# EAGLE board 1sluzba (EAGLE 8.5.0)
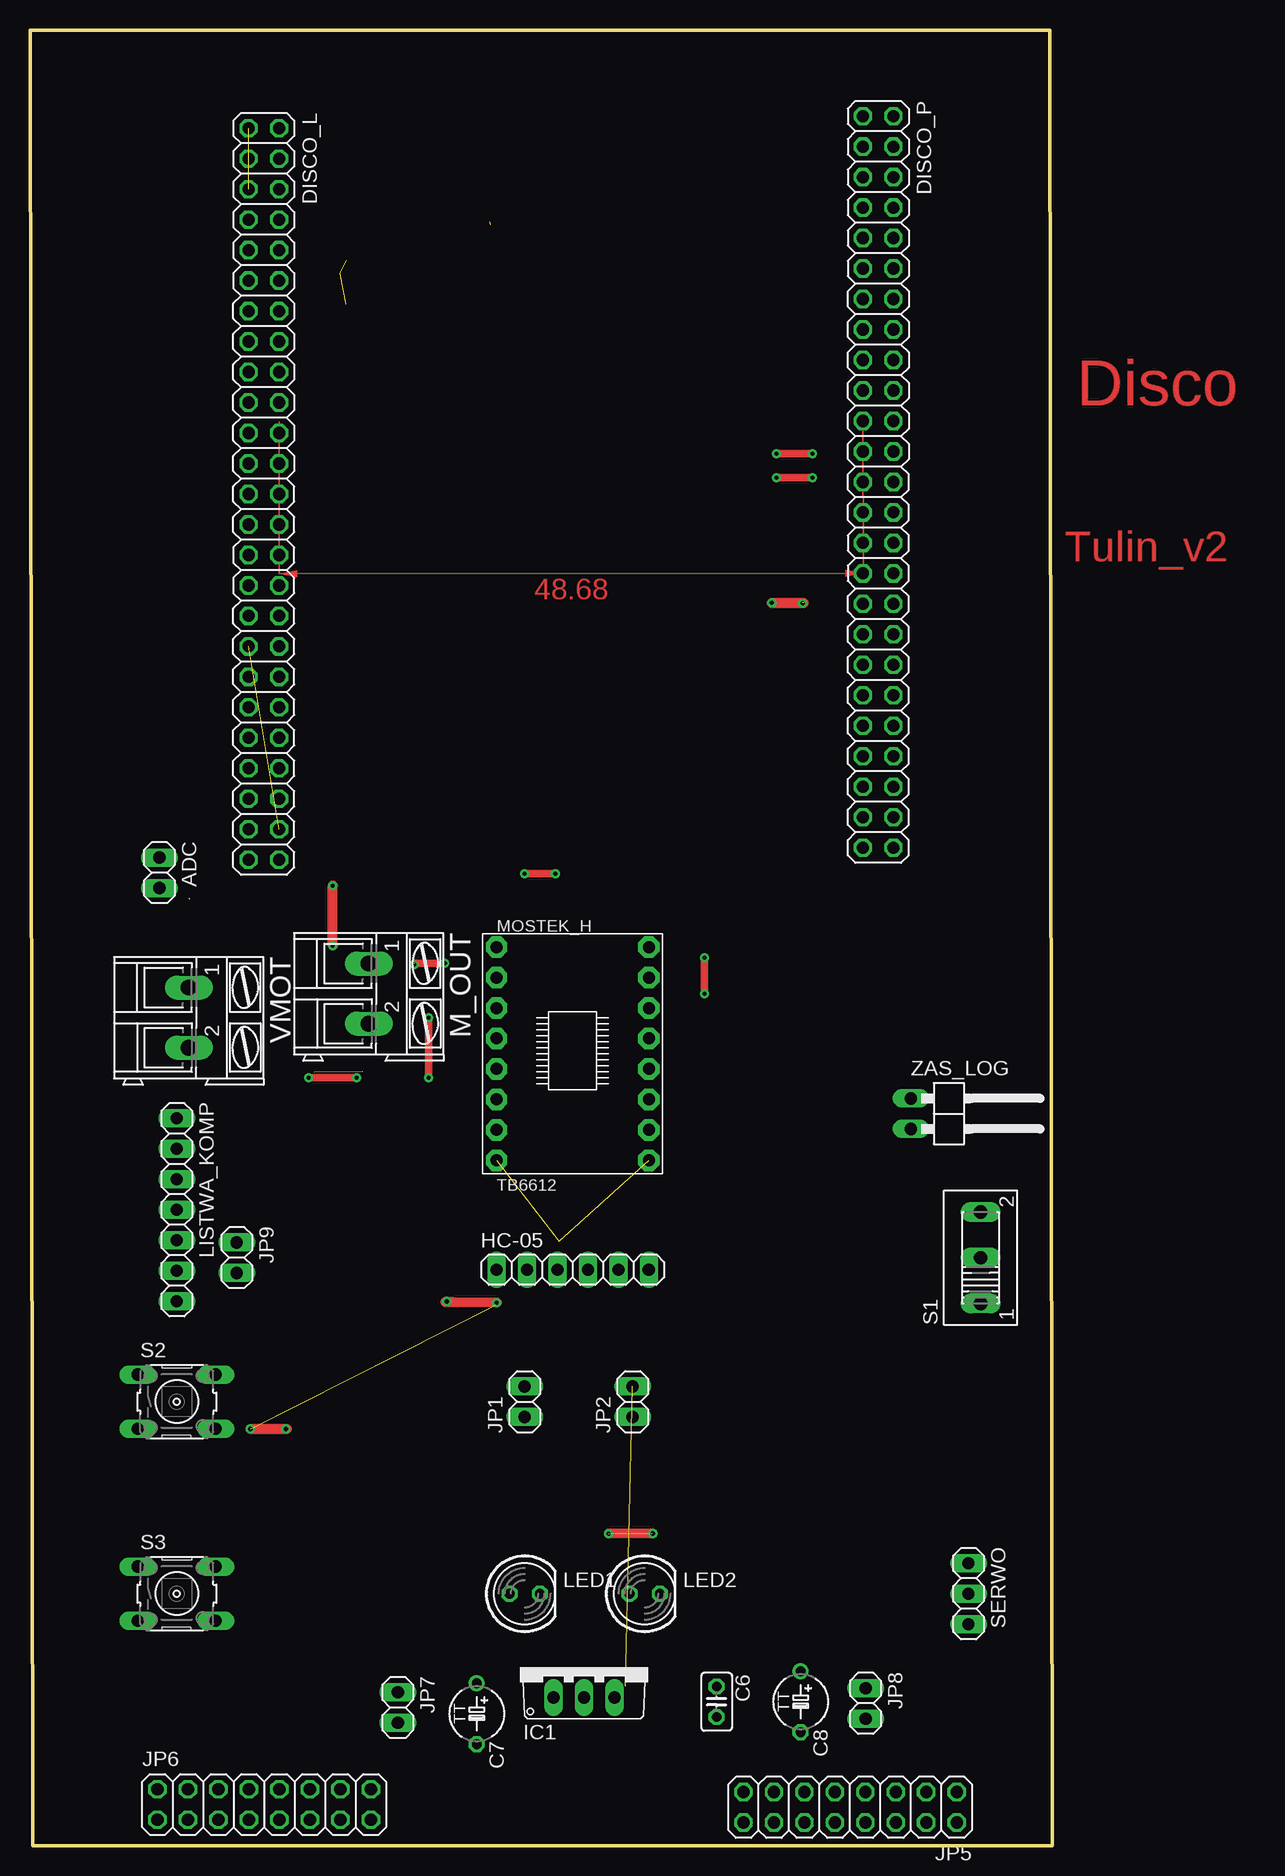
[diagram p0: board, top side]
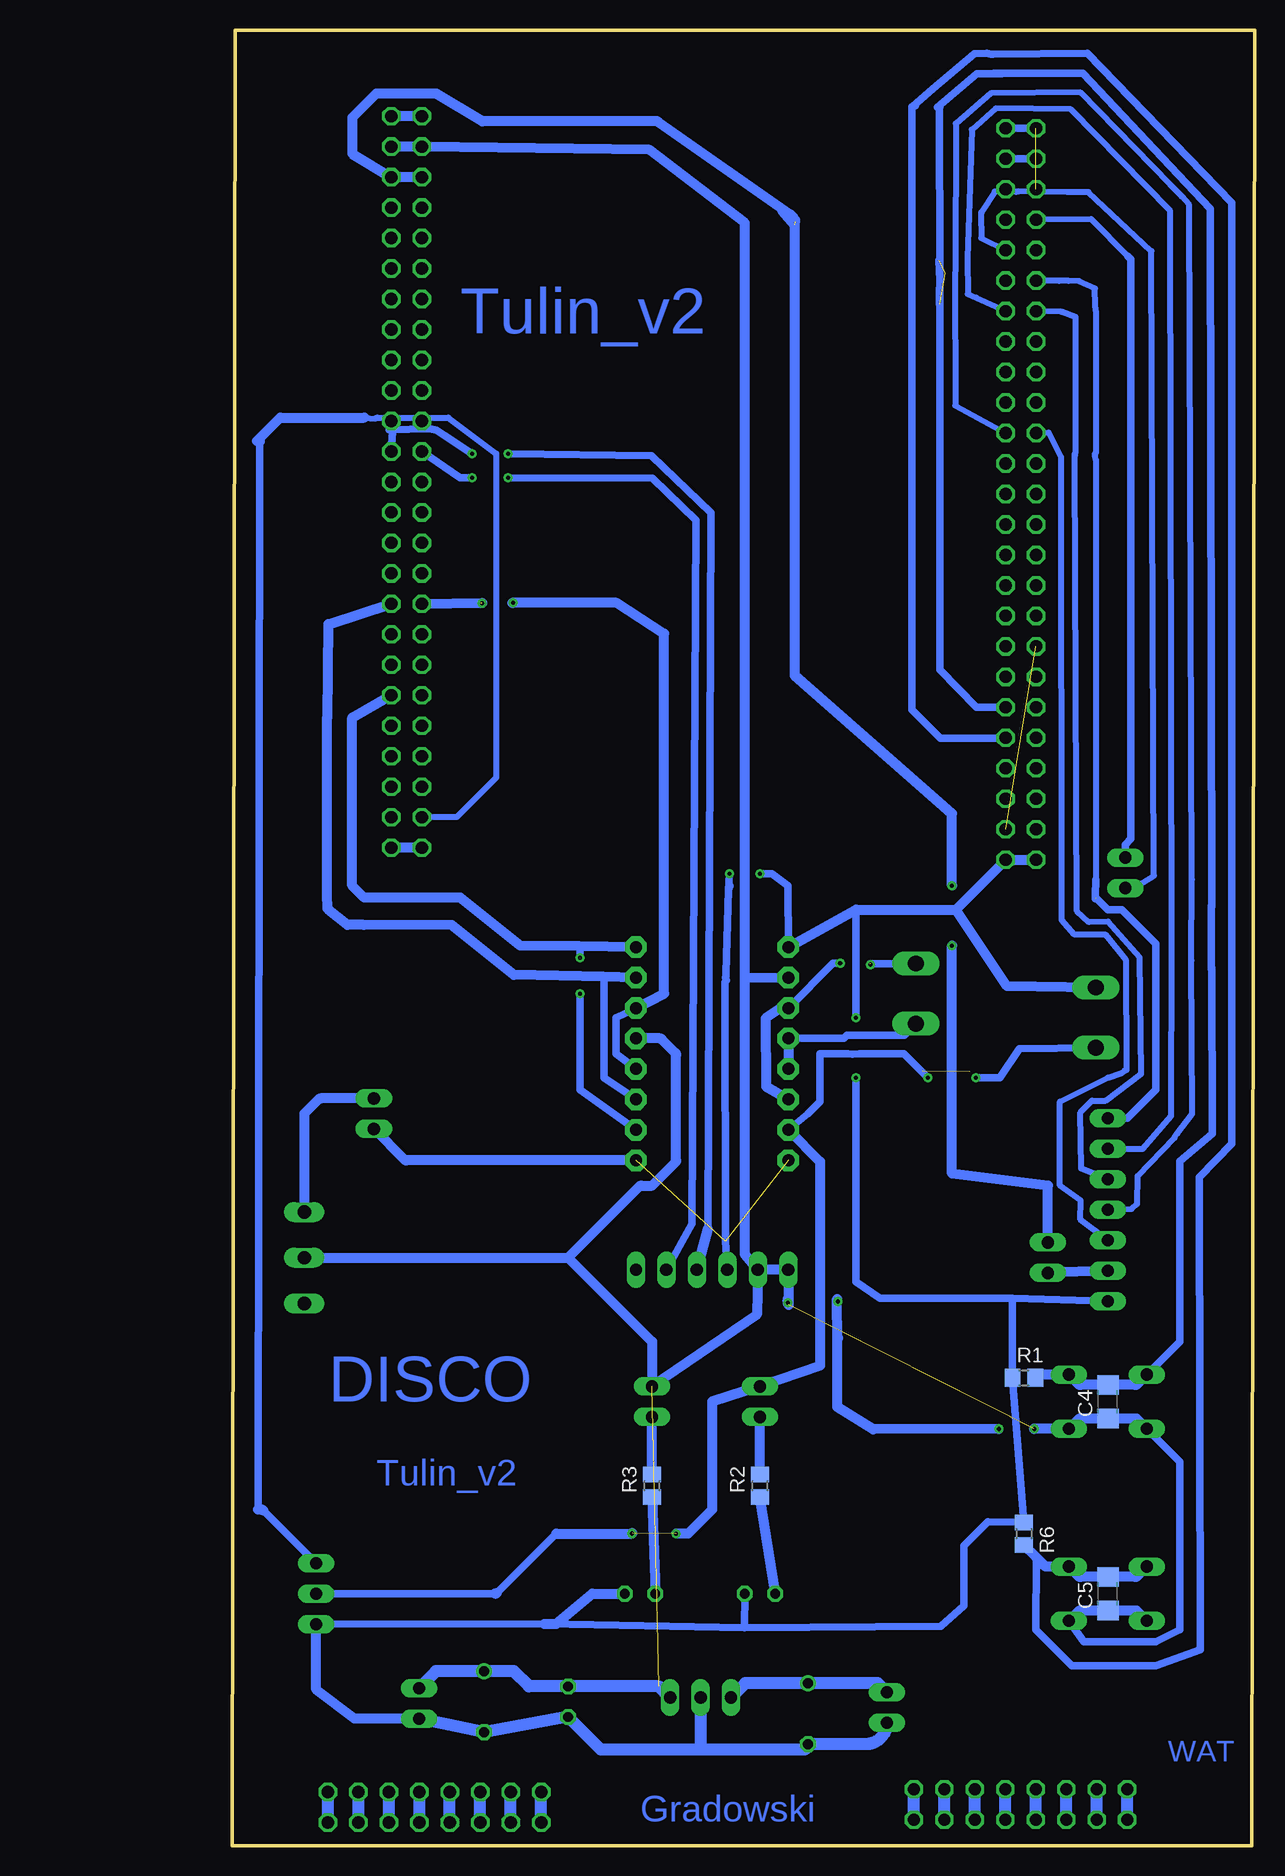
[diagram p1: board, bottom side, seen from below]

Size 85.24 x 151.31 mm. Coordinates in mm from the lower left corner, seen from the top.
Outline: 0.24,0 85.24,0 85,151.31 0,151.31 0.24,0
Copper layers (1*16): Top 0.035mm / dielectric 1.5mm / Bottom 0.035mm
Design rules "default": minimum track width 10mil, minimum drill 24mil, track to track 8mil, track to pad 8mil, pad to pad 8mil, via to via 8mil, smd to smd 8mil, copper to edge 40mil, drill to drill 8mil, minimum pad ring 10mil, minimum via ring 8mil, stop-mask expansion 4mil, vias tented up to drill 0mil, thermal gap 10mil

## Footprints (pad centres in the part's own frame; a part is rotated, then mirrored left to right if it is on the bottom)
1X02 = drill 1.016 long: 1 -1.27,0; 2 1.27,0
C1206 = smd 1.6 x 1.8: 1 -1.4,0; 2 1.4,0
C025-025X050 = drill 0.813 octagon: 1 -1.27,0; 2 1.27,0
TAP5-45 = drill 0.813: + -2.54,0 | drill 0.813 octagon: - 2.54,0
2X25 = drill 1.016 octagon: 1 -30.48,-1.27; 2 -30.48,1.27; 3 -27.94,-1.27; 4 -27.94,1.27; 5 -25.4,-1.27; 6 -25.4,1.27; 7 -22.86,-1.27; 8 -22.86,1.27; 9 -20.32,-1.27; 10 -20.32,1.27; 11 -17.78,-1.27; 12 -17.78,1.27; 13 -15.24,-1.27; 14 -15.24,1.27; 15 -12.7,-1.27; 16 -12.7,1.27; 17 -10.16,-1.27; 18 -10.16,1.27; 19 -7.62,-1.27; 20 -7.62,1.27; 21 -5.08,-1.27; 22 -5.08,1.27; 23 -2.54,-1.27; 24 -2.54,1.27; 25 0,-1.27; 26 0,1.27; 27 2.54,-1.27; 28 2.54,1.27; 29 5.08,-1.27; 30 5.08,1.27; 31 7.62,-1.27; 32 7.62,1.27; 33 10.16,-1.27; 34 10.16,1.27; 35 12.7,-1.27; 36 12.7,1.27; 37 15.24,-1.27; 38 15.24,1.27; 39 17.78,-1.27; 40 17.78,1.27; 41 20.32,-1.27; 42 20.32,1.27; 43 22.86,-1.27; 44 22.86,1.27; 45 25.4,-1.27; 46 25.4,1.27; 47 27.94,-1.27; 48 27.94,1.27; 49 30.48,-1.27; 50 30.48,1.27
1X06 = drill 1.016 long: 1 -6.35,0; 2 -3.81,0; 3 -1.27,0; 4 1.27,0; 5 3.81,0; 6 6.35,0
TO220V = drill 1.016 long: 1 -2.54,-2.54; 2 0,-2.54; 3 2.54,-2.54
2X08 = drill 1.016 octagon: 1 -8.89,-1.27; 2 -8.89,1.27; 3 -6.35,-1.27; 4 -6.35,1.27; 5 -3.81,-1.27; 6 -3.81,1.27; 7 -1.27,-1.27; 8 -1.27,1.27; 9 1.27,-1.27; 10 1.27,1.27; 11 3.81,-1.27; 12 3.81,1.27; 13 6.35,-1.27; 14 6.35,1.27; 15 8.89,-1.27; 16 8.89,1.27
LED5MM = drill 0.813 octagon: A -1.27,0; K 1.27,0
1X07 = drill 1.016 long: 1 -7.62,0; 2 -5.08,0; 3 -2.54,0; 4 0,0; 5 2.54,0; 6 5.08,0; 7 7.62,0
AK300/2 = drill 1.321 long: 1 -2.515,0; 2 2.489,0
MODUL_POLOLU = drill 1 pad 1.778 octagon: A02 -6.35,1.27; AIN1 6.35,3.81; AIN2 6.35,6.35; AO1 -6.35,3.81; BIN1 6.35,-1.27; BIN2 6.35,-3.81; BO1 -6.35,-3.81; BO2 -6.35,-1.27; GND1 -6.35,8.89; GND2 -6.35,-8.89; GND3 6.35,-8.89; PWMA 6.35,8.89; PWMB 6.35,-6.35; STBY 6.35,1.27; VCC -6.35,6.35; VMOT -6.35,-6.35
R0805 = smd 1.3 x 1.5: 1 -0.95,0; 2 0.95,0
255SB = drill 1.118 long: 1 -3.81,0; 2 0,0; 3 3.81,0
B3F-10XX = drill 1.016 long: 1 -3.251,2.261; 2 3.251,2.261; 3 -3.251,-2.261; 4 3.251,-2.261
1X03 = drill 1.016 long: 1 -2.54,0; 2 0,0; 3 2.54,0
1X02/90 = drill 1.016 long: 1 -1.27,-3.81; 2 1.27,-3.81

## Placement (x,y rotation side)
ADC  [1X02]  10.79,81.08 270 top
C4  100n  [C1206]  12.24,37 90 bottom
C5  100n  [C1206]  12.24,21 90 bottom
C6  100nF  [C025-025X050]  57.24,12 270 top
C7  47uF  [TAP5-45]  37.24,11 270 top
C8  470uF  [TAP5-45]  64.24,12 270 top
DISCO_L  [2X25]  19.5,112.65 270 top
DISCO_P  [2X25]  70.71,113.65 270 top
HC-05  [1X06]  45.24,48 0 top
IC1  786TV  [TO220V]  46.19,14.89 0 top
JP1  [1X02]  41.24,37 90 top
JP2  [1X02]  50.24,37 90 top
JP5  [2X08]  68.37,3.2 180 top
JP6  [2X08]  19.52,3.44 0 top
JP7  [1X02]  30.66,11.51 270 top
JP8  [1X02]  69.66,11.86 270 top
JP9  [1X02]  17.24,49 270 top
LED1  [LED5MM]  41.24,21 0 top
LED2  [LED5MM]  51.24,21 0 top
LISTWA_KOMP  [1X07]  12.24,53 270 top
M_OUT  [AK300/2]  28.24,71 270 top
MOSTEK_H  MODUL_POLOLU  [MODUL_POLOLU]  45.24,66 0 top
R1  100k  [R0805]  19.24,39 0 bottom
R2  300  [R0805]  41.24,30 90 bottom
R3  300  [R0805]  50.24,30 90 bottom
R6  100k  [R0805]  19.24,26 270 bottom
S1  [255SB]  79.24,49 90 top
S2  [B3F-10XX]  12.24,37 0 top
S3  [B3F-10XX]  12.24,21 0 top
SERWO  [1X03]  78.24,21 270 top
VMOT  [AK300/2]  13.24,69 270 top
ZAS_LOG  [1X02/90]  77.24,61 270 top

## Library data of the parts
ADC DISCO_L DISCO_P HC-05 JP1 JP2 JP5-JP9 LISTWA_KOMP SERWO ZAS_LOG = pinhead
C4-C8 = rcl; SPICEPREFIX: C
IC1 = linear
LED1 LED2 = led
M_OUT VMOT = con-ptr500; OC_FARNELL: unknown; OC_NEWARK: unknown
MOSTEK_H = TB6612FNG
R1-R3 R6 = rcl; SPICEPREFIX: R
S1 = switch
S2 S3 = switch-omron; MPN: B3F-1000; OC_FARNELL: 176432; OC_NEWARK: 36M3542

## Nets
3V: DISCO_P.5 DISCO_P.6 JP9.1
A: JP9.2 LISTWA_KOMP.6
BOOT0: DISCO_P.21
GND: C6.2 C7.- C8.- DISCO_L.49 DISCO_L.50 HC-05.3 IC1.2 JP7.2 JP8.2 LED1.K LED2.K LISTWA_KOMP.7 MOSTEK_H.GND1 MOSTEK_H.GND2 MOSTEK_H.GND3 R1.1 R6.1 SERWO.3 VMOT.1 ZAS_LOG.2
GND1: DISCO_L.1 DISCO_L.2 DISCO_L.5
GND2: DISCO_L.23
GND3: DISCO_P.1 DISCO_P.2
GNDD: DISCO_P.49 DISCO_P.50
M_OUT_1: M_OUT.1 MOSTEK_H.AO1 MOSTEK_H.BO1
M_OUT_2: M_OUT.2 MOSTEK_H.A02 MOSTEK_H.BO2
N$1: JP5.1 JP5.2
N$2: JP5.3 JP5.4
N$3: JP5.5 JP5.6
N$4: JP5.7 JP5.8
N$5: JP5.9 JP5.10
N$6: JP5.11 JP5.12
N$7: JP5.13 JP5.14
N$8: JP5.15 JP5.16
N$9: JP6.1 JP6.2
N$10: JP6.3 JP6.4
N$11: JP6.5 JP6.6
N$12: JP6.7 JP6.8
N$13: JP6.9 JP6.10
N$14: JP6.11 JP6.12
N$15: JP6.13 JP6.14
N$16: JP6.15 JP6.16
N$17: C7.+ IC1.1 JP7.1
N$18: S1.3 ZAS_LOG.1
N$19: LED1.A R2.1
N$20: LED2.A R3.1
N$22: JP1.1 R2.2
N$24: JP2.1 R3.2
NC: DISCO_L.35 DISCO_L.48
NRST: DISCO_L.6
PA0: DISCO_L.12
PA1: DISCO_L.11 LISTWA_KOMP.1
PA2: DISCO_L.14 LISTWA_KOMP.2
PA3: DISCO_L.13 LISTWA_KOMP.3
PA4: DISCO_L.16
PA5: DISCO_L.15
PA6: DISCO_L.18
PA7: DISCO_L.17
PA8: DISCO_P.43
PA9: DISCO_P.44
PA10: DISCO_P.41
PA13: DISCO_P.42
PA14: DISCO_P.39
PA15: DISCO_P.40 MOSTEK_H.PWMA MOSTEK_H.PWMB
PB0: DISCO_L.22 LISTWA_KOMP.4
PB1: DISCO_L.21 LISTWA_KOMP.5
PB2: DISCO_L.24
PB3: DISCO_P.28
PB4: DISCO_P.25
PB5: DISCO_P.26
PB6: DISCO_P.23 HC-05.5
PB7: DISCO_P.24 HC-05.4
PB8: DISCO_P.19
PB9: DISCO_P.20
PB10: DISCO_L.34
PB12: DISCO_L.36
PB13: DISCO_L.37
PB14: DISCO_L.38
PB15: DISCO_L.39
PC0: DISCO_L.8
PC1: ADC.1 DISCO_L.7
PC2: ADC.2 DISCO_L.10
PC3: DISCO_L.9
PC4: DISCO_L.20
PC5: DISCO_L.19
PC6: DISCO_P.47 SERWO.1
PC7: DISCO_P.48
PC8: DISCO_P.45
PC9: DISCO_P.46
PC10: DISCO_P.37
PC11: DISCO_P.38
PC12: DISCO_P.35
PC13: DISCO_P.12
PC14: DISCO_P.9
PC15: DISCO_P.10
PD0: DISCO_P.36
PD1: DISCO_P.33 MOSTEK_H.AIN1 MOSTEK_H.BIN1
PD2: DISCO_P.34 MOSTEK_H.AIN2 MOSTEK_H.BIN2
PD3: DISCO_P.31
PD4: DISCO_P.32
PD5: DISCO_P.29
PD6: DISCO_P.30
PD7: DISCO_P.27
PD8: C4.2 DISCO_L.40 R1.2 S2.1 S2.2
PD9: DISCO_L.41
PD10: C5.2 DISCO_L.42 R6.2 S3.1 S3.2
PD11: DISCO_L.43
PD12: DISCO_L.44
PD13: DISCO_L.45
PD14: DISCO_L.46
PD15: DISCO_L.47
PE0: DISCO_P.17
PE1: DISCO_P.18
PE2: DISCO_P.15
PE3: DISCO_P.16
PE4: DISCO_P.13
PE5: DISCO_P.14
PE6: DISCO_P.11
PE7: DISCO_L.25
PE8: DISCO_L.26
PE9: DISCO_L.27
PE10: DISCO_L.28
PE11: DISCO_L.29
PE12: DISCO_L.30
PE13: DISCO_L.31
PE14: DISCO_L.32
PE15: DISCO_L.33
PH0: DISCO_P.7
PH1: DISCO_P.8
VCC: C4.1 C5.1 C6.1 C8.+ DISCO_P.3 DISCO_P.4 HC-05.1 HC-05.2 IC1.3 JP2.2 JP8.1 MOSTEK_H.STBY MOSTEK_H.VCC S1.2 S2.3 S2.4 S3.3 S3.4
VDD: DISCO_L.3 DISCO_L.4
VDDA: DISCO_P.22
VMOT: JP1.2 MOSTEK_H.VMOT SERWO.2 VMOT.2

## Tracks (layer width: path | path; a pad name or v marks a point on that pad's centre or on a via)
3V  (via drill 0.35)  (1 unrouted)
  Top 0.813: v25.24,75 v25.24,80
  Bottom 0.813: DISCO_P.5 DISCO_P.6 75.24,141 75.24,144 73.24,146 68.24,146 64.41,143.7 49.75,143.7 49.66,143.6 38.7,135.93 38.49,135.71 38.32,135.49 38.63,135.46 38.31,135.35 38.35,97.51 25.24,86 v25.24,80 | JP9.1 17.24,55 25.24,56 v25.24,75 | 39.41,136.27 38.35,135.09
A
  Bottom 0.813: LISTWA_KOMP.6 JP9.2
GND  (via drill 0.35)  (2 unrouted)
  Top 0.61: v43.79,81 v41.24,81 | v33.24,69 v33.24,64
  Bottom 0.61: SERWO.3 59.24,18.49 42.55,18.15 | MOSTEK_H.GND1 38.91,79.99 40.24,81 v41.24,81 | HC-05.3 44.12,50.39 44.14,71.94 44.04,72.13 44.1,72.35 44.08,72.51 44.09,72.7 43.88,79.68 | 43.88,79.68 43.75,80 | 43.88,79.68 v43.79,81 | 33.24,78 v33.24,69 | LISTWA_KOMP.7 20.22,45.64 | 20.22,45.64 31.24,45.62 33.24,47 v33.24,64 | 20.22,45.64 R1.1 R6.1 22.24,27 24.24,25 24.24,20 26.15,18.31 42.55,18.15 | LED1.K 42.55,18.15
  Bottom 0.813: MOSTEK_H.GND1 33.24,78 24.93,78 | 24.93,78 DISCO_L.50 DISCO_L.49 | JP8.2 75.04,10.59 78.24,13 SERWO.3 | 59.24,18.49 58.24,18.49 55.24,21 LED2.K | VMOT.1 20.65,71.64 24.93,78 | MOSTEK_H.GND3 70.7,57.11 arc45 70.88,57.18 ZAS_LOG.2
  Bottom 1.016: JP7.2 arc90 32.44,8.46 C7.- arc90 37.7,8 46.24,8 | 46.24,8 54.51,8 C6.2 C8.- 67.22,10.08 JP8.2 | IC1.2 46.19,8.05 46.24,8
GND1  (1 unrouted)
  Bottom 0.61: DISCO_L.1 DISCO_L.2
GND3
  Bottom 0.813: DISCO_P.1 DISCO_P.2
GNDD
  Bottom 0.813: DISCO_P.49 DISCO_P.50
M_OUT_1  (via drill 0.35)  (1 unrouted)
  Top 0.61: v34.55,73.55 32.03,73.55 31.94,73.46
  Bottom 0.61: MOSTEK_H.AO1 35.15,73.55 v34.58,73.55 v34.55,73.55 | 34.46,73.55 v34.55,73.55 | v34.55,73.55 34.61,73.49 34.61,73.52 34.85,73.52 | M_OUT.1 32.05,73.52 32.08,73.49
  Bottom 0.813: MOSTEK_H.AO1 39.24,70 40.77,68.95 40.74,63.28 MOSTEK_H.BO1
M_OUT_2
  Bottom 0.61: MOSTEK_H.A02 34.26,67.27 34,67.53 29.22,67.53 M_OUT.2
  Bottom 0.813: MOSTEK_H.A02 MOSTEK_H.BO2
N$1
  Bottom 1.016: JP5.2 JP5.1
N$2
  Bottom 1.016: JP5.4 JP5.3
N$3
  Bottom 1.016: JP5.6 JP5.5
N$4
  Bottom 1.016: JP5.8 JP5.7
N$5
  Bottom 1.016: JP5.10 JP5.9
N$6
  Bottom 1.016: JP5.12 JP5.11
N$7
  Bottom 1.016: JP5.14 JP5.13
N$8
  Bottom 1.016: JP5.16 JP5.15
N$9
  Bottom 1.016: JP6.1 JP6.2
N$10
  Bottom 1.016: JP6.3 JP6.4
N$11
  Bottom 1.016: JP6.5 JP6.6
N$12
  Bottom 1.016: JP6.7 JP6.8
N$13
  Bottom 1.016: JP6.9 JP6.10
N$14
  Bottom 1.016: JP6.11 JP6.12
N$15
  Bottom 1.016: JP6.13 JP6.14
N$16
  Bottom 1.016: JP6.15 JP6.16
N$17
  Bottom 1.016: JP7.1 31.42,13.54 C7.+ 42.46,13.54 IC1.1
N$18
  Bottom 0.813: ZAS_LOG.1 77.86,62.27 arc-45 78.04,62.2 79.24,61 S1.3
N$19
  Bottom 0.813: LED1.A R2.1
N$20
  Bottom 0.813: R3.1 LED2.A
N$21  (1 unrouted)
N$22
  Bottom 0.813: R2.2 JP1.1
N$24
  Bottom 0.813: R3.2 JP2.1
N$26  (via drill 0.35)
  Top 0.813: v38.9,45.26 35.24,45.3 34.63,45.31
N$27  (via drill 0.35)
  Top 0.813: v18.37,34.73 v21.33,34.73 21.42,34.73
  Bottom 0.813: v21.33,34.73 31.82,34.7 34.79,36.55 34.79,42 | 34.79,42 34.79,42.39 34.73,42.33 | 34.79,42 34.81,45.56 34.82,45.26
N$28  (via drill 0.35)
  other vias: 34.75,45.35
N$29  (via drill 0.35)
  other vias: 64.41,103.54
N$30  (via drill 0.35)
  other vias: 32.03,73.43
NC  (1 unrouted)
PA1  (1 unrouted)
  Bottom 0.508: 13.25,80.49 13.26,115.53 13.31,115.88 13.21,116.15 13.21,127.75 13.3,128.33 13.31,129.77 14.66,130.37 15.51,130.41 16.31,130.41 DISCO_L.11
  Bottom 0.61: 13.25,80.49 13.3,79.19 13.3,78.91 | LISTWA_KOMP.1 10.62,60.62 8.24,63 8.24,75.17 11.07,78 12.24,78 13.24,79
PA2
  Bottom 0.508: LISTWA_KOMP.2 9.34,58.07 6.97,60.82 6.93,74.87 7.04,136.24 15.32,144.69 21.59,144.77 23.58,143 23.95,132.29 23.92,129.31 23.24,129 DISCO_L.14
PA3
  Bottom 0.508: LISTWA_KOMP.3 14.23,56.35 14.46,56.42 14.53,61.12 13.58,62.1 12.42,62.09 9.46,64.33 9.58,74.01 12.24,77 13.82,76.96 14.82,77.88 15.01,115.35 15.01,115.8 14.98,115.84 14.98,116.04 14.93,116.12 14.93,127.39 16.1,127.82 DISCO_L.13
PA15  (via drill 0.35)  (1 unrouted)
  Top 0.61: v56.24,71 v56.24,74
  Bottom 0.61: MOSTEK_H.PWMB 56.24,63 v56.24,71 | 56.24,74.94 v56.24,74
  Bottom 0.813: MOSTEK_H.PWMA 56.24,74.94 61.24,75 66.24,79 74.24,79 75.24,80 75.24,94 DISCO_P.40
PB0
  Bottom 0.508: LISTWA_KOMP.4 12.24,53.05 10.26,53.08 9.79,53.48 9.75,55.83 6.69,58.99 6.44,59.37 5.22,60.99 5.27,73.75 5.24,80.53 5.46,136.74 6.09,137.45 7.04,138.42 14.56,146.1 22,146.02 24.92,143.51 24.95,131.29 24.98,131.06 24.96,120 DISCO_L.22
PB1
  Bottom 0.508: LISTWA_KOMP.5 14.52,52.18 14.51,53.76 16.24,55 16.24,62 12.24,64 11.15,64.36 10.84,64.59 10.68,64.64 10.72,73.78 12.4,75.9 15.02,75.92 16.09,77.12 16.12,115.71 17.17,117.75 DISCO_L.21
PB6  (via drill 0.35)
  Top 0.61: v65.24,114 v62.24,114
  Bottom 0.61: HC-05.5 46.92,51.83 46.56,110.45 50.2,113.95 v62.24,114 | DISCO_P.23 66.24,114 v65.24,114
PB7  (via drill 0.35)
  Top 0.61: v65.24,116 v62.24,116
  Bottom 0.61: 45.6,51.32 45.31,111.09 50.29,115.83 v62.24,116 | DISCO_P.24 71.88,117.85 71.77,118.09 71.88,117.98 72.18,118 68.73,118.07 68.22,117.97 67.56,117.52 v65.24,116
  Bottom 0.813: HC-05.4 45.6,51.38 45.6,51.32
PC1
  Bottom 0.508: 10.57,132.45 13.62,135.55 DISCO_L.7
  Bottom 0.61: ADC.1 10.79,83.43 10.32,83.9 10.32,132.2 10.57,132.45
  Bottom 0.813: 17.89,135.74 arc-45 18.06,135.67 DISCO_L.7
PC2
  Bottom 0.508: ADC.2 10.16,79.76 8.41,80.85 8.61,132.88 13.85,137.79 15.64,137.8 17.98,137.82 19.7,137.87 | 19.7,137.87 19.88,137.8 | 19.7,137.87 21.68,137.85 22.79,136.11 22.82,136 22.8,133.97 DISCO_L.10
PC6
  Bottom 0.508: 74.24,119 73.31,118.93 arc45 73.13,119 67.24,119 63.24,116 63.24,89 66.46,85.78 arc45 66.63,85.71 DISCO_P.47
  Bottom 0.61: SERWO.1 82.63,27.93 | 83.08,28 82.94,117.02
  Bottom 0.813: 82.63,27.93 arc-45 82.8,28 83.08,28 | 82.94,117.02 arc45 83.17,117.07 81.24,119 74.24,119
PD1  (via drill 0.35)  (1 unrouted)
  Top 0.813: v61.84,103.57 64.52,103.57
  Bottom 0.61: MOSTEK_H.BIN1 53.24,66 53.24,69 MOSTEK_H.AIN1
  Bottom 0.813: MOSTEK_H.AIN1 49.24,71 49.24,101 53.19,103.57 v61.84,103.57 61.9,103.57 | DISCO_P.33 64.4,103.57
PD2
  Bottom 0.61: MOSTEK_H.BIN2 54.24,64 54.23,72.41
  Bottom 0.813: MOSTEK_H.AIN2 54.23,72.41 61.78,72.58 66.95,76.71 74.27,76.74 75.65,76.74 77.24,78 77.3,78.12 77.33,79.24 77.33,93.96 77.29,94 77.22,101.79 DISCO_P.34
PD8  (2 unrouted)
  Bottom 0.61: DISCO_L.40 23.19,94.86 26.24,98 26.24,130.41 26.34,132.1 | 26.31,128.44 26.26,131.35 26.27,144.62 26.26,144.96 26.29,144.89 26.44,144.89 23.16,147.67 21.08,147.67 21.8,147.65 21.74,147.69 14.32,147.69 3.7,136.43 3.57,78.26 3.6,78.33 3.61,73.06 3.56,73.06 3.57,73.16 3.54,59.35 6.24,57.03 6.24,42.01 S2.1
  Bottom 0.813: S2.1 9.77,38.47 arc45 9.95,38.4 C4.2 14.52,38.4 arc45 14.71,38.47 S2.2 17.92,39.26 arc-45 18.1,39.19 R1.2
PD10
  Bottom 0.61: 17.71,23.52 17.86,23.52 18.1,23.77 | S3.2 16.24,23.26 | 18.21,24.02 18.24,18 15.24,15 8.24,15 4.52,16.33 4.61,55.72 1.91,58.51 1.91,73.11 1.9,72.12 1.9,136.9 13.95,149.38 21.81,149.3 21.98,149.28 22.31,149.38 23.35,149.34 26.81,146.43 28.51,144.94 28.28,144.99 28.57,144.91 28.57,94.68 26.19,92.3 20.79,92.3 DISCO_L.42
  Bottom 0.813: S3.1 9.77,22.47 arc45 9.95,22.4 C5.2 14.52,22.4 arc45 14.71,22.47 S3.2 | 16.24,23.26 17.34,23.26 arc45 17.52,23.34 17.71,23.52 18.21,24.02 R6.2
VCC  (2 unrouted)
  Bottom 0.61: S3.4 14.24,17 8.24,17 6.24,18 6.24,32 S2.3
  Bottom 0.813: DISCO_P.4 DISCO_P.3 50.45,141.33 42.5,135.23 42.51,72.3 | MOSTEK_H.VCC 42.51,72.3 | HC-05.2 HC-05.1 38.86,45.08 38.95,45.56 | HC-05.2 42.51,49.3 42.51,72.3 | HC-05.2 41.51,44.25 JP2.2 50.24,42 57.24,49 | S1.2 57.24,49 | 57.24,49 51.31,54.93 arc45 51.13,55 50.24,55 48.31,56.93 arc-45 48.24,57.11 48.24,65.89 arc-45 48.31,66.07 49.44,67.2 arc-45 49.61,67.27 MOSTEK_H.STBY | S3.3 9.77,19.53 arc-45 9.95,19.6 C5.1 14.52,19.6 arc-45 14.71,19.53 S3.4 | S2.3 9.77,35.53 arc-45 9.95,35.6 C4.1 14.52,35.6 arc-45 14.71,35.53 S2.4 18.41,34.76 18.37,34.71
  Bottom 1.016: IC1.3 49.65,13.27 C6.1 60.51,13.27 61.78,14.54 C8.+ 68.25,14.54 JP8.1
VDD
  Bottom 0.61: DISCO_L.3 DISCO_L.4
VMOT  (via drill 0.35)  (1 unrouted)
  Top 0.61: v27.24,64 v23.24,64
  Top 0.813: v51.92,26.02 v48.24,26
  Bottom 0.61: SERWO.2 63.34,21 | 63.17,21.07 58.24,26 | VMOT.2 19.63,66.41 21.24,64 v23.24,64 | MOSTEK_H.VMOT 37.24,61 36.24,62 36.24,66 33.93,66 33.52,65.97 32.93,66 32.55,66 29.24,66 v27.24,64
  Bottom 0.813: 63.34,21 arc-45 63.17,21.07 | 58.24,26 51.96,26.01 arc45 51.87,26.04 | MOSTEK_H.VMOT 36.24,57 36.24,40 JP1.2 45.24,37 45.24,28 47.24,26 v48.24,26
(copper drawn outside any net)
  shapes: Top area x1

## Text on the board
Top: Disco | Tulin_v2
Bottom: Tulin_v2 | DISCO | Tulin_v2 | WAT | Gradowski